# Altium PCB debug-board.PcbDoc
Units mil, origin at the board's own origin, x right, y up, seen from the top; angles counter-clockwise.
Board outline 1370 x 1120 mil, 2 copper layers (Top Layer, Bottom Layer); 5 components, 8 nets, 64 pads, 264 vias.
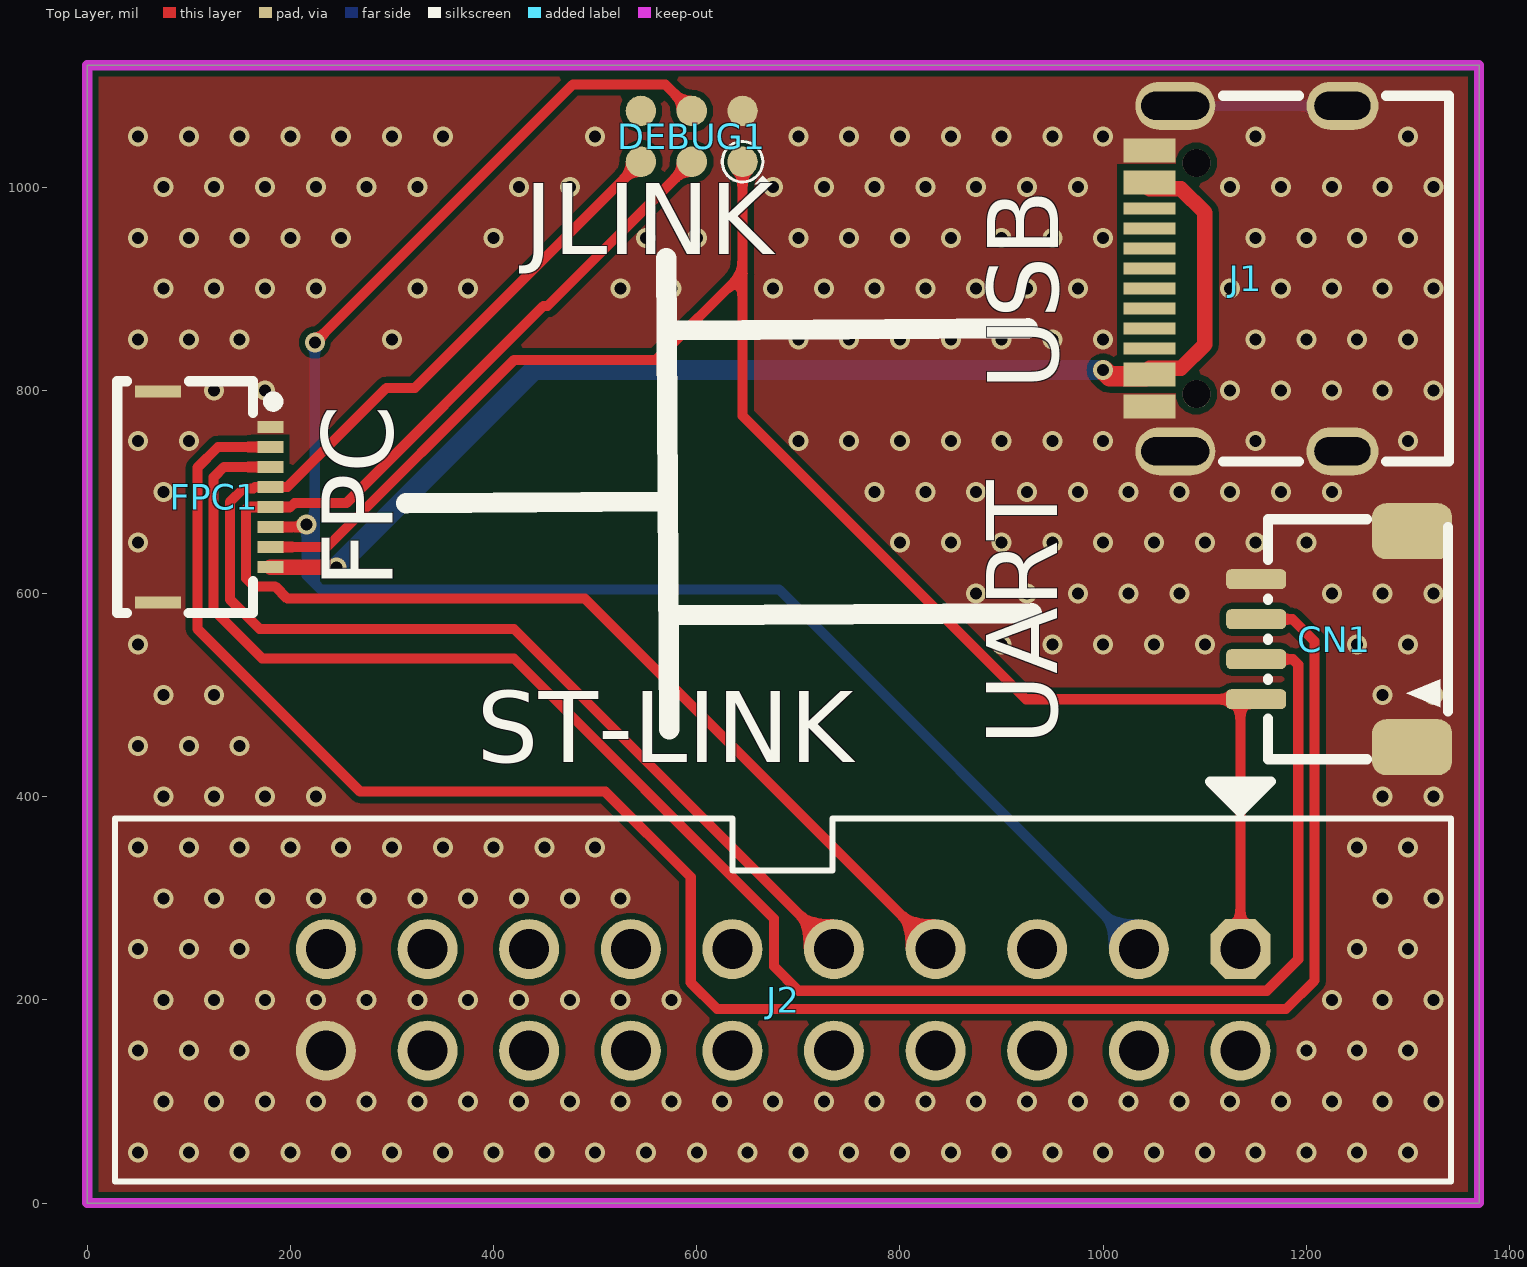
[diagram p0: Top Layer view]
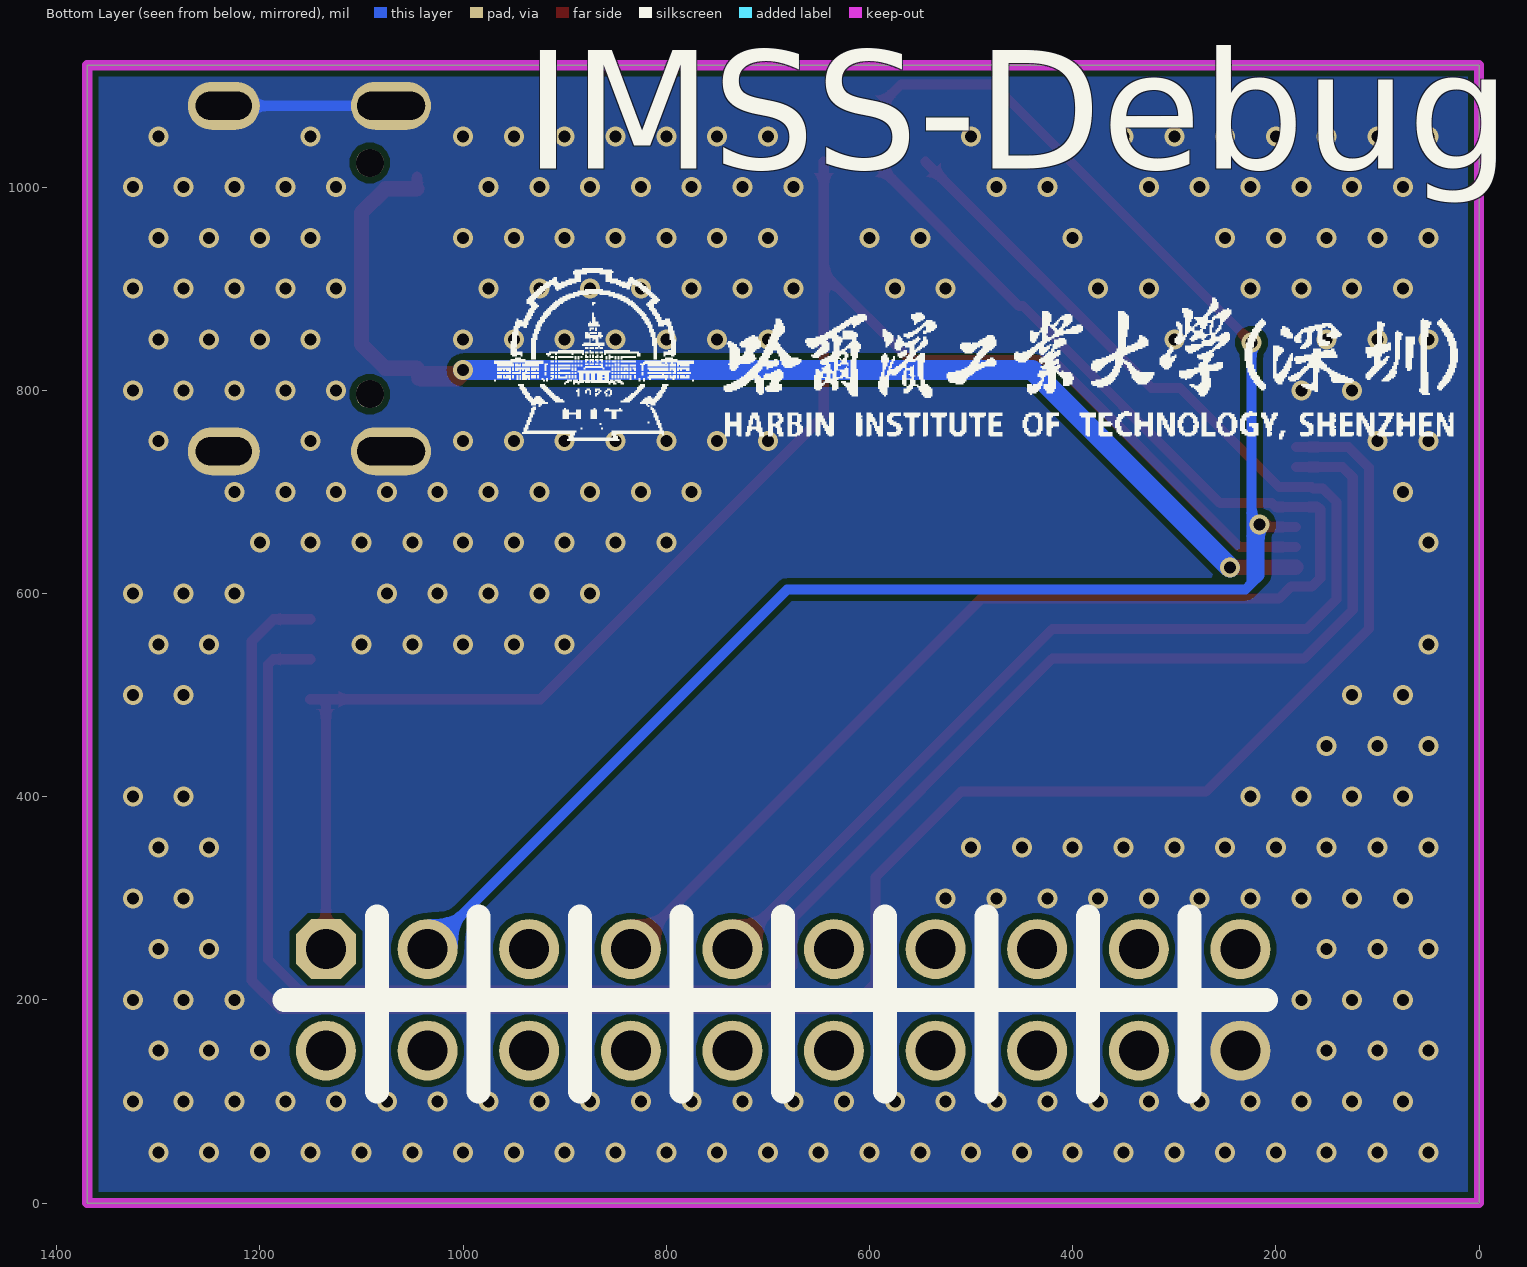
[diagram p1: Bottom Layer view, seen from below]
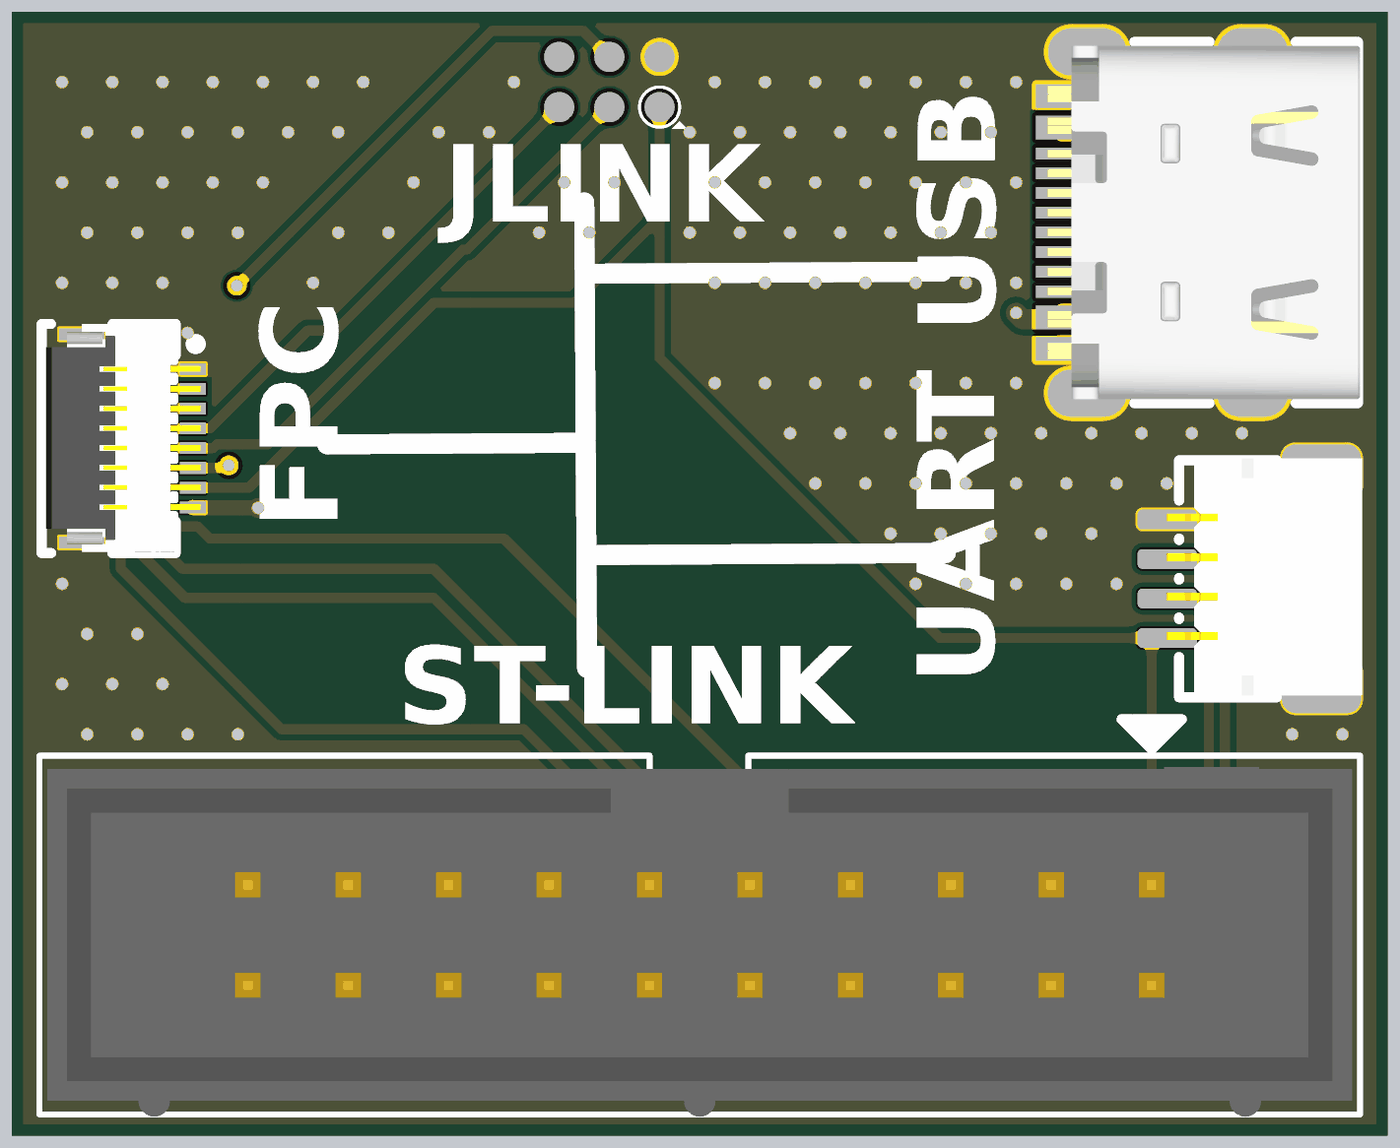
[diagram p2: 3D render of the assembled board from above, using the file's embedded part models]

## Layer stack, top to bottom
Top Solder: solder mask 0.4, Solder Resist, Dk 3.5
Top Layer: signal copper 1.4
Dielectric 1: dielectric 12.6, FR-4, Dk 4.8
Bottom Layer: signal copper 1.4
Bottom Solder: solder mask 0.4, Solder Resist, Dk 3.5

## Board outline
0,0 0,1120 1370,1120 1370,0

## Design rules (kind name [scope] priority, off if disabled: settings)
Clearance [All] p1: gap=6 ignorepadtopadclearanceinfootprint=FALSE
PlaneConnect [All] p1: planeconnectstyle=Direct reliefexpansion=20 reliefentries=4 reliefconductorwidth=10 reliefairgap=10
PolygonConnect [All] p1: connectstyle=Direct reliefconductorwidth=10 reliefentries=4 polygonreliefangle="90 Angle" airgapwidth=10
RoutingVias [All] p1: holewidth=11.81 width=19.68 viastyle="Through Hole" minholewidth=11.81 minwidth=19.68 maxholewidth=11.81 maxwidth=19.68
SolderMaskExpansion [All] p1: expansion=4 istentingtop=FALSE
SupplyNets "Schematic Supply Nets_4" [InNet('GND')] p1: voltage=0.000
SupplyNets "Schematic Supply Nets_3" [InNet('5VUSB')] p2: voltage=0.000
SupplyNets "Schematic Supply Nets_2" [InNet('3V3')] p3: voltage=0.000
Width [All] p1: maxlimit=30 minlimit=4 preferedwidth=10
29 further rules are at their usual default settings.

## Components (designator, comment, footprint, x,y, rotation, side; value= is the part's Value field where it differs from the comment)
CN1 "UART-IN" CONN-SMD_4P-P1.00_WF10004-01200 1227.29,555 r90 top
DEBUG1 "DEBUG" "DEBUG-2x3P-1.27mm Pitch" 645,1025 r180 top
FPC1 "HC-FPC-05-10-8RLTAG" FPC-SMD_8P-P0.50_HCTL_HC-FPC-05-10-8RLTAG 124.88,695 r90 top
J1 "USB TYPE-C" TYPE-C-16P 1140.43,910 r90 top
J2 "JTAG/SWD-HEADER" JATG/SWD 1135,250 r180 top

## Footprints (in the part's own frame and the unit in brackets; to place one, negate y for a bottom-side part, rotate by r counter-clockwise, add the part's x,y. Pads: shape width x height; smd on the part's side, far side on the other; paste and mask are expansions set on the pad)
CONN-SMD_4P-P1.00_WF10004-01200 [mm]
  rrect50% 0.5x1.5 smd mask+0.051: 1(-1.5,1.95) 2(-0.5,1.95) 3(0.5,1.95) 4(1.5,1.95)
  rrect50% 1.4x2 smd mask+0.051: 5(2.7,-1.95) 6(-2.7,-1.95)
  silkscreen extent -3,-2.85 3,1.65, body extent -2.95,-2.98 3.05,1.97, height 2.9
"DEBUG-2x3P-1.27mm Pitch" [mil]
  round 30 smd: 1(0,0) 2(50,0) 3(100,0) 4(0,-50) 5(50,-50) 6(100,-50)
  silkscreen extent -28,-20 20,22
FPC-SMD_8P-P0.50_HCTL_HC-FPC-05-10-8RLTAG [mm]
  rect 0.3x0.65 smd paste+0 mask+0.05: 1(1.75,-1.405) 2(1.25,-1.405) 3(0.75,-1.405) 4(0.25,-1.405) 5(-0.25,-1.405) 6(-0.75,-1.405) 7(-1.25,-1.405) 8(-1.75,-1.405)
  rect 0.3x1.15 smd paste+0 mask+0.05: 9(-2.635,1.405) 10(2.635,1.405)
  silkscreen extent -2.9,-1.6 2.89,2.42, body extent -2.89,-1.61 2.89,2.31, height 1.01
JATG/SWD [mm]
  oct 1.5x1.5 hole 1: 1(0,0)
  round 1.5 hole 1: 2(0,2.54) 3(2.54,0) 4(2.54,2.54) 5(5.08,0) 6(5.08,2.54) 7(7.62,0) 8(7.62,2.54) 9(10.16,0) 10(10.16,2.54) 11(12.7,0) 12(12.7,2.54) 13(15.24,0) 14(15.24,2.54) 15(17.78,0) 16(17.78,2.54) 17(20.32,0) 18(20.32,2.54) 19(22.86,0) 20(22.86,2.54)
  silkscreen extent -5.27,-4.19 28.13,5.81, body extent -5.07,-2.98 27.93,5.87, height 9.13
TYPE-C-16P [mm]
  oval 1.2x2 hole 0.7 slot 1.7 at 90 deg: 1(-4.32,1.765) 2(4.32,1.765)
  oval 1.2x1.8 hole 0.7 slot 1.4 at 90 deg: 3(-4.32,-2.415) 4(4.32,-2.415)
  rect 0.3x1.3 smd: A1(-3.35,2.415) A4(-2.55,2.415) A5(-1.25,2.415) A6(-0.25,2.415) A7(0.25,2.415) A8(1.25,2.415) A9(2.55,2.415) A12(3.35,2.415) B1(3.05,2.415) B4(2.25,2.415) B5(1.75,2.415) B6(0.75,2.415) B7(-0.75,2.415) B8(-1.75,2.415) B9(-2.25,2.415) B12(-3.05,2.415)
  round 0.7 hole 0.7 unplated: ""(-2.89,1.235) ""(2.89,1.235)
  silkscreen extent -4.57,-5.08 4.57,0.57, body extent -4.47,-5.13 4.47,2.77, height 3.15

## Part data
CN1: library part SH1.0-4P, "连接器", Current Rating (Max)=500mA, JLCPCB Part Class="Extended Part", LCSC Part Name="1mm 1x4P 卧贴", Manufacturer=ATOM(爱特姆), Manufacturer Part=WF10004-01200, Operating Temperature Range=-25℃~+85℃, Add into BOM=yes, Convert to PCB=yes, Datasheet=https://atta.szlcsc.com/upload/public/pdf/source/20200107/C479990_7EE1728C707014A64676B41D860FB4D7.pdf, Device=WF10004-01200, Gender=公型插针, Mounting Style=卧贴, Name=WF10004-01200, Number of PINs Per Row=4, Number of Rows=1, Pins Structure=1x4P, Pitch=1mm, Reference Series=-, Row Spacing=-, Supplier=LCSC, Supplier Footprint=SMD,P=1mm, Supplier Part=C479990, Symbol=WF10004-01200
DEBUG1: library part DEBUG-PogoPin-2x6P, "弹簧探针烧录/调试触点"
FPC1: "FPC连接器 0.5mm pitch 8p", JLCPCB Part Class=扩展库, LCSC Part Name="翻盖式 下接 P数:8P 间距:0.5mm", Manufacturer=HCTL(华灿天禄), Operating Temperature Range=-55℃~+85℃, Add into BOM=yes, Contact Material=铜合金, Contact Type=下接, Convert to PCB=yes, Datasheet=https://atta.szlcsc.com/upload/public/pdf/source/20221027/B2DE489DA152049D1F105170189CFB4E.pdf, Device=HC-FPC-05-10-8RLTAG, FFC, FCB Thickness=0.3mm, Height Above Board=1mm, Locking Feature=翻盖式, Manufacturer Part=HC-FPC-05-10-8RLTAG, Mounting Type=卧贴, Name=HC-FPC-05-10-8RLTAG, Number of Contacts=8P, Pitch=0.5mm, Supplier=LCSC, Supplier Footprint=SMD,P=0.5mm,卧贴, Supplier Part=C5213730, Symbol=HC-FPC-05-10-8RLTAG
J1: "USB TYPE-C 母座"
J2: "调试接口"

## Via types
v1: diameter 19.68, hole 11.81, Top Layer to Bottom Layer, tented both sides, 262 vias
v2: diameter 19.68, hole 11.81, Top Layer to Bottom Layer, 2 vias

## Nets (pads, with @x,y where several pads share a name; then routed paths per layer and width w, separated by ;. In a path a pad name is that pad's centre, name@x,y a point inside that pad or via, vN(x,y) a via of type N, cw(c..) or ccw(c..) an arc to the next point about the centre after c; other vN are vias at no path point)
3V3: CN1.1 DEBUG1.1 FPC1.7 J2.1 | length 1695.4
  Top Layer w10: FPC1.7 235.95,645.79 420.16,830 560,830 645,915 ; DEBUG1.1 645,915 ; J2.1 1135,491.1 CN1.1@1139.84,495.95 ; CN1.1 CN1.1@1139.84,495.95 ; 645,915 645,775 924.06,495.95 CN1.1@1139.84,495.95
5VUSB: FPC1.8 J1.A4 J1.A9 J1.B4 J1.B9 | length 1234.8
  Top Layer w10: J1.A4@1041.25,813.7 1041.25,809.61 J1.A4 J1.B9 ; J1.B4 J1.A9
  Top Layer w15: FPC1.8 180.45,625.85 244.99,625.85 v1(245.24,625.6) ; J1.B9 1045.62,821.69 1076.53,821.69 1100,845.16 1100,974.84 1076.53,998.31 1045.63,998.31 J1.B4
  Top Layer w20: v1(1000,820) 1006.3,813.7 J1.A4@1041.25,813.7
  Bottom Layer w20: v1(245.24,625.6) 439.64,820 v1(1000,820)
GND: CN1.4 CN1.5 CN1.6 DEBUG1.4 FPC1.1 FPC1.9 FPC1.10 J1.1 J1.2 J1.3 J1.4 J1.A1 J1.A12 J1.B1 J1.B12 J2.20 | length 164.6
  Bottom Layer w10: J1.2 J1.4
  other v1: 50,50 100,50 150,50 200,50 250,50 300,50 350,50 400,50 450,50 500,50 550,50 600,50 650,50 700,50 750,50 800,50 850,50 900,50 950,50 1000,50 1050,50 1100,50 1150,50 1200,50 1250,50 1300,50 75,100 125,100 175,100 225,100 275,100 325,100 375,100 425,100 475,100 525,100 575,100 625,100 675,100 725,100 775,100 825,100 875,100 925,100 975,100 1025,100 1075,100 1125,100 1175,100 1225,100 1275,100 1325,100 50,150 100,150 150,150 1200,150 1250,150 1300,150 75,200 125,200 175,200 225,200 275,200 325,200 375,200 425,200 475,200 525,200 575,200 1225,200 1275,200 1325,200 50,250 100,250 150,250 1250,250 1300,250 75,300 125,300 175,300 225,300 275,300 325,300 375,300 425,300 475,300 525,300 1275,300 1325,300 50,350 100,350 150,350 200,350 250,350 300,350 350,350 400,350 450,350 500,350 1250,350 1300,350 75,400 125,400 175,400 225,400 1275,400 1325,400 50,450 100,450 150,450 75,500 125,500 1275,500 1325,500 50,550 900,550 950,550 1000,550 1050,550 1100,550 1250,550 1300,550 875,600 925,600 975,600 1025,600 1075,600 1225,600 1275,600 1325,600 50,650 800,650 850,650 900,650 950,650 1000,650 1050,650 1100,650 1150,650 1200,650 75,700 775,700 825,700 875,700 925,700 975,700 1025,700 1075,700 1125,700 1175,700 1225,700 50,750 100,750 700,750 750,750 800,750 850,750 900,750 950,750 1000,750 1150,750 1300,750 125,800 175,800 1125,800 1175,800 1225,800 1275,800 1325,800 50,850 100,850 150,850 300,850 700,850 750,850 800,850 850,850 900,850 950,850 1000,850 1150,850 1200,850 1250,850 1300,850 75,900 125,900 175,900 225,900 325,900 375,900 525,900 575,900 675,900 725,900 775,900 825,900 875,900 925,900 975,900 1125,900 1175,900 1225,900 1275,900 1325,900 50,950 100,950 150,950 200,950 250,950 400,950 550,950 600,950 700,950 750,950 800,950 850,950 900,950 950,950 1000,950 1150,950 1200,950 1250,950 1300,950 75,1000 125,1000 175,1000 225,1000 275,1000 325,1000 425,1000 475,1000 675,1000 725,1000 775,1000 825,1000 875,1000 925,1000 975,1000 1125,1000 1175,1000 1225,1000 1275,1000 1325,1000 50,1050 100,1050 150,1050 200,1050 250,1050 300,1050 350,1050 500,1050 700,1050 750,1050 800,1050 850,1050 900,1050 950,1050 1000,1050 1150,1050 1300,1050
LPUART1_RX: CN1.2 FPC1.3 | length 1787.5
  Top Layer w10: FPC1.3 134.56,724.53 124.4,714.38 124.4,583.84 172.24,536 420,536 676,280 676,233 700,209 1161,209 1192,240 1192,530 1186.68,535.32 CN1.2
NRST: DEBUG1.5 FPC1.6 J2.3 | length 1782.3
  Top Layer w10: FPC1.6 213.47,665.47 v2(216,668) ; v2(224,847) 478,1101 569,1101 DEBUG1.5
  Bottom Layer w10: v2(216,668) 216,618 224,610 ; v2(224,847) 224,610 ; J2.3 681,604 230,604 224,610
SWCLK: DEBUG1.3 FPC1.4 J2.9 | length 1376.3
  Top Layer w10: DEBUG1.3 322.32,802.32 294.48,802.32 197,704.84 FPC1.4 165,704.84 163.57,703.41 153.82,703.41 140.4,690 140.4,594.28 169.68,565 420,565 J2.9
SWDIO: DEBUG1.2 FPC1.5 J2.7 | length 1478
  Top Layer w10: DEBUG1.2 453,883 449,883 255,689 204,689 200.16,685.16 FPC1.5 158.56,685.16 156.4,683 156.4,615 164.4,607 185,607 197,595 490,595 J2.7
TX: CN1.3 FPC1.2 | length 1966.3
  Top Layer w10: FPC1.2 128.8,744.21 108.4,723.82 108.4,565.37 268.77,405 510,405 594,321 594,217 620,191 1180,191 1208,219 1208,553 1186.31,574.69 CN1.3
pads on no net: DEBUG1.6 J1. J1.A5 J1.A6 J1.A7 J1.A8 J1.B5 J1.B6 J1.B7 J1.B8 J2.2 J2.4 J2.5 J2.6 J2.8 J2.10 J2.11 J2.12 J2.13 J2.14 J2.15 J2.16 J2.17 J2.18 J2.19

## Polygon pours and split planes (outlines as drawn)
GND on Top Layer "NONET_L-01_P-001" (solid, remove dead copper, pour order 0): 0,0 1370,0 1370,1120 0,1120
GND on Bottom Layer "NONET_L-01_P-001" (solid, remove dead copper, pour order 1): 0,0 1380,0 1400,20 1400,1140 20,1140 0,1120

## Keep-outs
Keep-Out Layer:
  the board outline again, w10

## Silkscreen, mask and mechanical layers (free items; w line width, h text height)
Top Overlay:
  lines w20: 314.07,688.95 571.43,690.49 ; 570,930 572.78,466.26 ; 574.07,858.95 925.93,861.05 ; 578.13,578.61 930,580.72
  text "JLINK" at 430,911 h120
  text "USB" at 979,800 h120 r90
  text "FPC" at 324,605 h120 r90
  text "UART" at 978,450 h120 r90
  text "ST-LINK" at 383.6,411 h120
Bottom Overlay:
  drawing of 231 lines, arcs and shapes, not listed
  text "IMSS-Debug" at 940,979.7 h200
Mechanical 1:
  the board outline again, w10